# Altium PCB STPedal.PcbDoc
Units mm, origin at the board's own origin, x right, y up, seen from the top; angles counter-clockwise.
Board outline 119 x 94 mm, 2 copper layers (Top Layer, Bottom Layer); 123 components, 78 nets, 413 pads, 17 vias.
Unrouted connection lines stored in the file: 277.
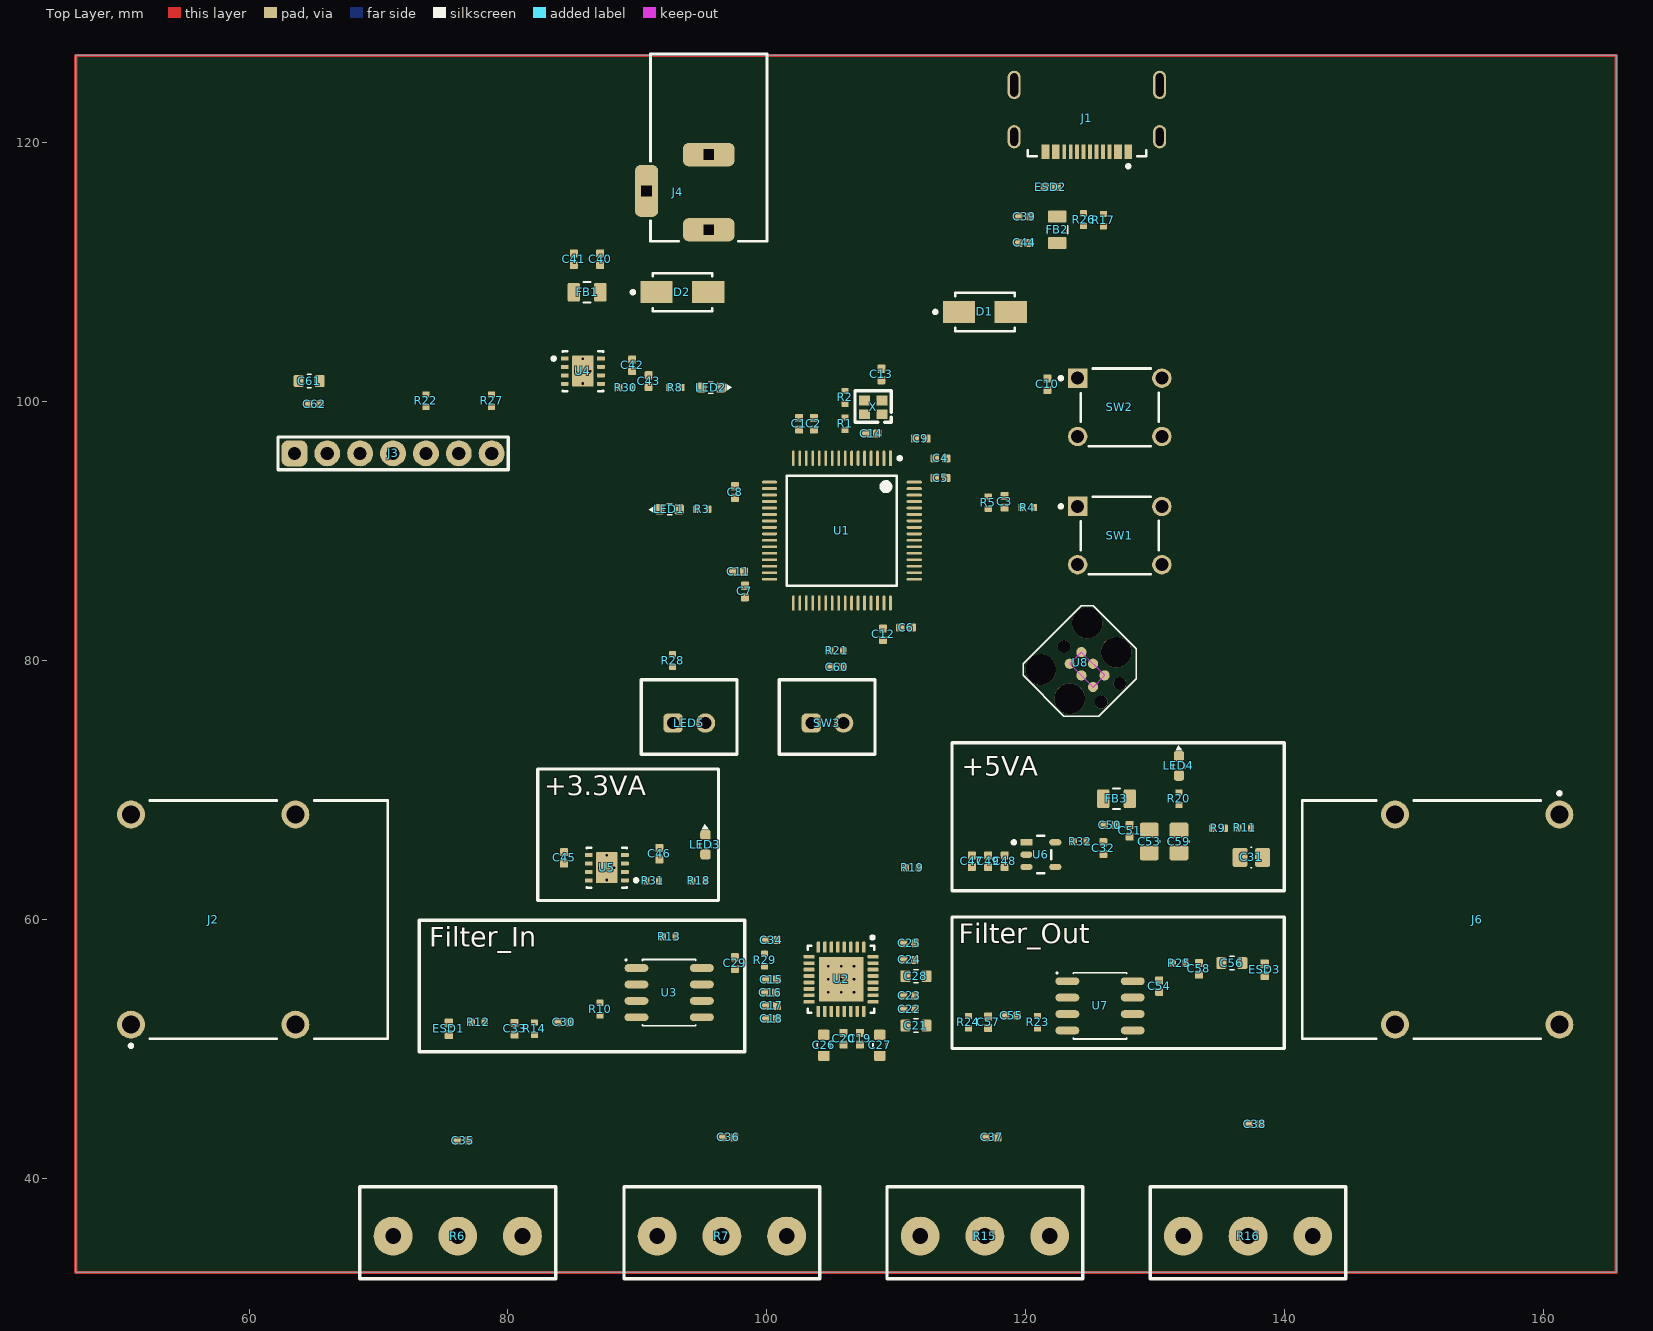
[diagram p0: Top Layer view]
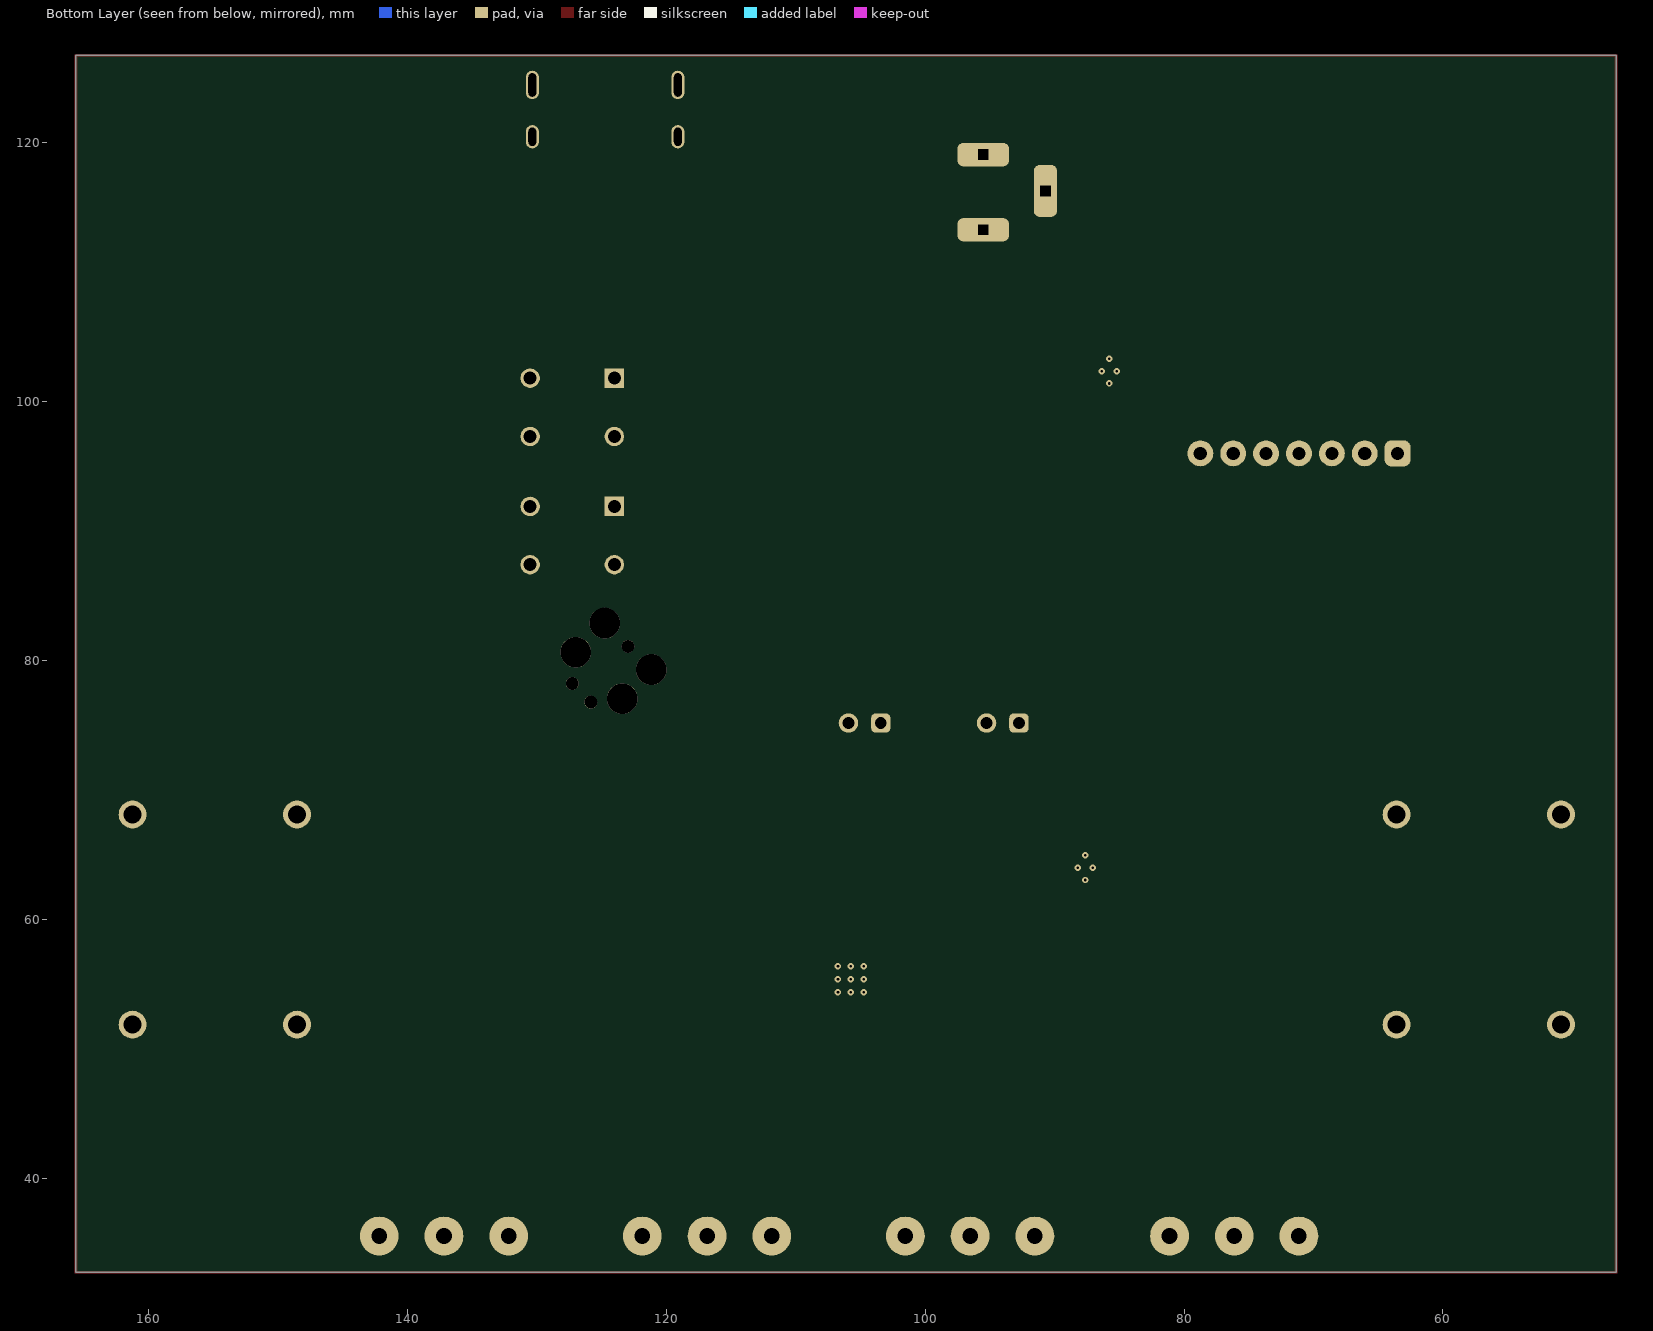
[diagram p1: Bottom Layer view, seen from below]

## Layer stack, top to bottom
Top Solder: solder mask 0.0102, Solder Resist, Dk 3.5
Top Layer: signal copper 0.0356
Dielectric 1: dielectric 0.32, FR-4, Dk 4.8
Bottom Layer: signal copper 0.0356
Bottom Solder: solder mask 0.0102, Solder Resist, Dk 3.5

## Board outline
46.608,32.746 46.608,126.746 165.608,126.746 165.608,32.746

## Design rules (kind name [scope] priority, off if disabled: settings)
Clearance [All] p1: gap=0.254 ignorepadtopadclearanceinfootprint=FALSE
DiffPairsRouting [All] p1: maxlimit=0.254 minlimit=0.254 mostfreqgap=0.254 toplayer_minwidth=0.381 toplayer_maxwidth=0.381 toplayer_prefwidth=0.381 bottomlayer_minwidth=0.381 bottomlayer_maxwidth=0.381 bottomlayer_prefwidth=0.381 maxuncoupledlength=12.7
PolygonConnect [All] p1: connectstyle=Relief reliefconductorwidth=0.254 reliefentries=4 polygonreliefangle="90 Angle" airgapwidth=0.254
RoutingVias [All] p1: holewidth=0.711 width=1.27 viastyle="Through Hole" minholewidth=0.711 minwidth=1.27 maxholewidth=0.711 maxwidth=1.27
SolderMaskExpansion [All] p1: expansion=0 istentingtop=FALSE
SupplyNets "Schematic Supply Nets_8" [InNet('VBUS')] p1: voltage=0.000
SupplyNets "Schematic Supply Nets_7" [InNet('+5V')] p2: voltage=0.000
SupplyNets "Schematic Supply Nets_6" [InNet('+5VA')] p3: voltage=0.000
SupplyNets "Schematic Supply Nets_5" [InNet('+3.3VA')] p4: voltage=0.000
SupplyNets "Schematic Supply Nets_4" [InNet('VREF')] p5: voltage=0.000
SupplyNets "Schematic Supply Nets_3" [InNet('VCC')] p6: voltage=0.000
SupplyNets "Schematic Supply Nets_2" [InNet('+3.3V')] p7: voltage=0.000
SupplyNets "Schematic Supply Nets_1" [InNet('GND')] p8: voltage=0.000
SupplyNets "Schematic Supply Nets" [InNet('VBUS_FIL')] p9: voltage=0.000
Width [All] p1: maxlimit=0.254 minlimit=0.254 preferedwidth=0.254
29 further rules are at their usual default settings.

## Classes and differential pairs
component class STPedal_STM32: C1 C2 C3 C4 C5 C6 C7 C8 C9 C10 C11 C12 C13 C14 LED1 R1 R2 R3 R4 R5 R28 SW1 SW2 U1 U8 X
component class STPedal_Power: C32 C40 C41 C42 C43 C45 C46 C47 C48 C49 C50 C51 C53 C59 D1 D2 FB1 FB3 J4 LED2 LED3 LED4 R8 R18 R19 R20 R30 R31 R32 U4 U5 U6
component class STPedal_Peripherals: C35 C36 C37 C38 C39 C44 C61 C62 ESD2 FB2 J1 J3 R6 R7 R15 R16 R17 R22 R26 R27
component class STPedal_Audio: C15 C16 C17 C18 C19 C20 C21 C22 C23 C24 C25 C26 C27 C28 C29 C30 C31 C33 C34 C54 C55 C56 C57 C58 ESD1 ESD3 J2 J6 R9 R10 R11 R12 R13 R14 R23 R24 R25 R29 U2 U3 U7
differential pair USB_DATA: +USB_DATA_P -USB_DATA_N

## Components (designator, comment, footprint, x,y, rotation, side; value= is the part's Value field where it differs from the comment)
C1 "1uF" CAPC_0402_1005X55N 102.489,98.298 r270 top
C2 "10nF" CAPC_0402_1005X55N 103.632,98.298 r270 top
C3 "0.1uF" CAPC_0402_1005X55N 118.364,92.266 r270 top
C4 "4.7uF" CAPC_0402_1005X55N 113.411,95.631 r180 top
C5 "0.1uF" CAPC_0402_1005X55N 113.411,94.107 r180 top
C6 "0.1uF" CAPC_0402_1005X55N 110.744,82.55 r180 top
C7 "0.1uF" CAPC_0402_1005X55N 98.298,85.344 r90 top
C8 "0.1uF" CAPC_0402_1005X55N 97.536,93.027 r270 top
C9 "0.1uF" CAPC_0402_1005X55N 111.887,97.155 r180 top
C10 "0.1uF" CAPC_0402_1005X55N 121.666,101.346 r90 top
C11 "2.2uF" CAPC_0402_1005X55N 97.79,86.868 r0 top
C12 "2.2uF" CAPC_0402_1005X55N 108.966,82.042 r90 top
C13 "6pF" CAPC_0402_1005X55N 108.839,102.108 r270 top
C14 "6pF" CAPC_0402_1005X55N 108.077,97.536 r180 top
C15 "1uF" CAPC_0402_1005X55N 100.33,55.372 r0 top
C16 "1uF" CAPC_0402_1005X55N 100.267,54.356 r0 top
C17 "1uF" CAPC_0402_1005X55N 100.33,53.34 r0 top
C18 "1uF" CAPC_0402_1005X55N 100.33,52.324 r0 top
C19 "1uF" CAPC_0402_1005X55N 107.188,50.8 r90 top
C20 "1uF" CAPC_0402_1005X55N 105.918,50.8 r90 top
C21 "10uF" RESC_0603_1608X55N 111.506,51.816 r180 top
C22 "1uF" CAPC_0402_1005X55N 110.998,53.086 r180 top
C23 "0.1uF" CAPC_0402_1005X55N 110.998,54.102 r180 top
C24 "4.7uF" CAPC_0402_1005X55N 110.998,56.896 r180 top
C25 "0.1uF" CAPC_0402_1005X55N 110.998,58.166 r180 top
C26 "10uF" RESC_0603_1608X55N 104.394,50.292 r90 top
C27 "10uF" RESC_0603_1608X55N 108.712,50.292 r90 top
C28 "10uF" RESC_0603_1608X55N 111.506,55.626 r180 top
C29 "0.1uF" CAPC_0402_1005X55N 97.528,56.642 r90 top
C30 "2.2uF" CAPC_0402_1005X55N 84.32,52.07 r180 top
C31 "47uF" CAPC_0805_2012X145N 137.414,64.799 r180 top
C32 "2.2uF" CAPC_0402_1005X55N 125.984,65.524 r90 top
C33 "10nF" CAPC_0402_1005X55N 80.51,51.562 r90 top
C34 "10nF" CAPC_0402_1005X55N 100.33,58.42 r180 top
C35 "0.1uF" CAPC_0402_1005X55N 76.517,42.926 r180 top
C36 "0.1uF" CAPC_0402_1005X55N 97.028,43.18 r180 top
C37 "0.1uF" CAPC_0402_1005X55N 117.348,43.18 r180 top
C38 "0.1uF" CAPC_0402_1005X55N 137.668,44.196 r180 top
C39 "2.2uF" CAPC_0402_1005X55N 119.888,114.3 r0 top
C40 "2.2uF" CAPC_0402_1005X55N 87.122,110.998 r270 top
C41 "2.2uF" CAPC_0402_1005X55N 85.09,110.998 r270 top
C42 "2.2uF" CAPC_0402_1005X55N 89.595,102.807 r90 top
C43 "2.2uF" CAPC_0402_1005X55N 90.865,101.6 r270 top
C44 "2.2uF" CAPC_0402_1005X55N 119.888,112.268 r0 top
C45 "2.2uF" CAPC_0402_1005X55N 84.328,64.77 r270 top
C46 "2.2uF" CAPC_0402_1005X55N 91.694,65.087 r270 top
C47 "2.2uF" CAPC_0402_1005X55N 115.824,64.508 r270 top
C48 "2.2uF" CAPC_0402_1005X55N 118.364,64.508 r270 top
C49 "2.2uF" CAPC_0402_1005X55N 117.094,64.508 r270 top
C50 "2.2uF" CAPC_0402_1005X55N 126.492,67.302 r180 top
C51 "2.2uF" CAPC_0402_1005X55N 128.016,66.857 r90 top
C53 "47uF" CAPC_0805_2012X145N 129.54,66.032 r90 top
C54 "0.1uF" CAPC_0402_1005X55N 130.302,54.864 r270 top
C55 "2.2uF" CAPC_0402_1005X55N 118.872,52.578 r0 top
C56 "10uF" RESC_0603_1608X55N 135.911,56.642 r180 top
C57 "10nF" CAPC_0402_1005X55N 117.094,52.07 r90 top
C58 "10nF" CAPC_0402_1005X55N 133.371,56.197 r90 top
C59 "47uF" CAPC_0805_2012X145N 131.826,66.032 r90 top
C60 "0.1uF" CAPC_0402_1005X55N 105.41,79.502 r0 top
C61 "10uF" RESC_0603_1608X55N 64.643,101.6 r0 top
C62 "0.1uF" CAPC_0402_1005X55N 65.024,99.822 r0 top
D1 "B120AF-13" FP-SMAF-MFG 116.84,106.934 r0 top
D2 "B120AF-13" FP-SMAF-MFG 93.472,108.458 r0 top
ESD1 "CG0402MLU-12G" DIOC_0402_1005X41N 75.43,51.562 r90 top
ESD2 "CG0402MLU-12G" DIOC_0402_1005X41N 121.92,116.586 r0 top
ESD3 "CG0402MLU-12G" DIOC_0402_1005X41N 138.451,56.134 r90 top
FB1 "100R" FBC_0805_2012X105N 86.106,108.458 r180 top
FB2 "100R" FBC_0805_2012X105N 122.428,113.284 r270 top
FB3 "600R" FBC_0805_2012X105N 127,69.334 r0 top
J1 "216990-0001" FP-216990-0001-MFG 124.714,123.317 r180 top
J2 "NMJ4HFD2" FP-NMJ4HFD2-MFG 54.102,60 r180 top
J3 "7P_HeaderF" 7P_2.54 71.12,96.012 r0 top
J4 "694106301002" 694106301002 95.504,119.634 r180 top
J6 "NMJ4HFD2" FP-NMJ4HFD2-MFG 157.988,60 r0 top
LED1 "LED_White_JLCD_0603" LED_0603_1608 92.456,91.694 r180 top
LED2 "LED_Red_JLCD_0603" LED_0603_1608 95.691,101.092 r0 top
LED3 "LED_Red_JLCD_0603" LED_0603_1608 95.25,65.786 r90 top
LED4 "LED_Red_JLCD_0603" LED_0603_1608 131.826,71.874 r90 top
LED5 "LED_EXT_2.54mm" "Plugin 2P, 2.5mm" 94,75.184 r0 top
R1 "100" RESC_0402_1005X40N 106.045,98.298 r90 top
R2 "1k" RESC_0402_1005X40N 106.045,100.33 r270 top
R3 "1k" RESC_0402_1005X40N 94.996,91.694 r0 top
R4 "100" RESC_0402_1005X40N 120.142,91.821 r0 top
R5 "1k" RESC_0402_1005X40N 117.094,92.202 r270 top
R6 "250k" POT_Plugin-3P_5mm 76.12,35.56 r0 top
R7 "250k" POT_Plugin-3P_5mm 96.52,35.56 r0 top
R8 "1k" RESC_0402_1005X40N 92.918,101.092 r180 top
R9 "1k" RESC_0402_1005X40N 134.874,67.056 r180 top
R10 "1M" RESC_0402_1005X40N 87.114,53.086 r270 top
R11 "1k" RESC_0402_1005X40N 136.906,67.085 r180 top
R12 "100" RESC_0402_1005X40N 77.716,52.07 r0 top
R13 "100" RESC_0402_1005X40N 92.448,58.674 r0 top
R14 "1M" RESC_0402_1005X40N 82.034,51.562 r90 top
R15 "250k" POT_Plugin-3P_5mm 116.84,35.56 r0 top
R16 "250k" POT_Plugin-3P_5mm 137.16,35.56 r0 top
R17 "5.1k" RESC_0402_1005X40N 125.984,114.025 r270 top
R18 "1k" RESC_0402_1005X40N 94.721,62.992 r180 top
R19 "1k" RESC_0402_1005X40N 111.231,64.008 r180 top
R20 "1k" RESC_0402_1005X40N 131.826,69.334 r90 top
R21 "10k" RESC_0402_1005X40N 105.41,80.772 r180 top
R22 "10k" RESC_0402_1005X40N 73.66,100.076 r90 top
R23 "1M" RESC_0402_1005X40N 120.904,52.07 r270 top
R24 "100" RESC_0402_1005X40N 115.57,52.07 r90 top
R25 "100" RESC_0402_1005X40N 131.847,56.642 r180 top
R26 "5.1k" RESC_0402_1005X40N 124.46,114.067 r270 top
R27 "10k" RESC_0402_1005X40N 78.74,100.076 r90 top
R28 "1k" RESC_0402_1005X40N 92.71,80.01 r90 top
R29 "0" RESC_0402_1005X40N 99.822,56.875 r270 top
R30 "0" RESC_0402_1005X40N 89.087,101.092 r0 top
R31 "0" RESC_0402_1005X40N 91.186,62.992 r0 top
R32 "0" RESC_0402_1005X40N 124.206,66.032 r0 top
SW1 "B3F-1000" OMRON-B3F-1000-4_V 127.254,89.662 r0 top
SW2 "B3F-1000" OMRON-B3F-1000-4_V 127.254,99.568 r0 top
SW3 "Switch_Ext_B2B-XH-A" "Plugin 2P, 2.5mm" 104.668,75.184 r0 top
U1 "STM32F405RGT6TR" FP-LQFP64-5W-IPC_C 105.791,90.043 r270 top
U2 "TLV320AIC3204IRHBR" RHB0032E_V 105.729,55.392 r270 top
U3 "TL072" SO-8 92.448,54.356 r0 top
U4 "LP5907QMFX-3.3Q1" FP-DRB0008J-MFG 85.785,102.362 r0 top
U5 "LP5907QMFX-3.3Q1" FP-DRB0008J-MFG 87.63,64.008 r180 top
U6 "NCP718BSNADJT1G" FP-419AE-01-IPC_C 121.158,65.016 r0 top
U7 "TL072" SO-8 125.73,53.34 r0 top
U8 "TC2030_CTX" TC2030_CTX 124.74,79.31 r315 top
X "CS08891-24M" "4 SMD - No Lead" 108.204,99.568 r180 top

## Footprints (in the part's own frame and the unit in brackets; to place one, negate y for a bottom-side part, rotate by r counter-clockwise, add the part's x,y. Pads: shape width x height; smd on the part's side, far side on the other; paste and mask are expansions set on the pad)
"4 SMD - No Lead" [mm]
  rect 0.85x0.75 smd: 1(-0.675,-0.525) 2(0.675,-0.525) 3(0.675,0.525) 4(-0.675,0.525)
  silkscreen extent -1.4,-1.27 1.4,1.14, body extent -1.05,-0.85 1.05,0.85, height 0.51
7P_2.54 [mm] "7 Pin, 2.54mm pitch"
  rrect50% 2x2 hole 1.02: 1(-7.62,0)
  round 2 hole 1.02: 2(-5.08,0) 3(-2.54,0) 4(0,0) 5(2.54,0) 6(5.08,0) 7(7.62,0)
  silkscreen extent -8.89,-1.27 8.89,1.27, body extent -9.14,-1.27 9.14,1.27, height 8.51
694106301002 [mm] "DC Power Jack Right Angled(6.4)"
  rrect50% 4x1.8 hole 0.8 square: 1(0,6.35) 2(0,0.55)
  rrect50% 1.8x4 hole 0.8 square: 3(4.8,3.35)
  silkscreen extent -4.5,-7.25 4.5,7.25, body extent -4.5,-7.25 5,7.25, height 10.75
CAPC_0402_1005X55N [mm] "Chip Capacitor, 2-Leads, Body 1.00x0.50mm, IPC Medium Density"
  rrect25% 0.63x0.62 smd: 1(-0.445,0) 2(0.445,0)
  body extent -0.5,-0.25 0.5,0.25, height 0.55
CAPC_0805_2012X145N [mm] "Chip Capacitor, 2-Leads, Body 2.00x1.25mm, IPC Medium Density"
  rrect25% 1.15x1.45 smd: 1(-0.875,0) 2(0.875,0)
  silkscreen extent -0.04,-0.79 0.04,0.79, body extent -1,-0.63 1,0.63, height 1.45
DIOC_0402_1005X41N [mm] "Chip Diode, 2-Leads, Body 1.00x0.50mm, IPC Medium Density"
  rrect25% 0.7x0.65 smd: 1(-0.45,0) 2(0.45,0)
  body extent -0.5,-0.25 0.5,0.25, height 0.41
FBC_0805_2012X105N [mm] "Ferrite Bead, 2-Leads, Body 2.00x1.25mm, IPC Medium Density"
  rrect25% 0.95x1.45 smd: 1(-1.025,0) 2(1.025,0)
  silkscreen extent -0.29,-0.79 0.29,0.79, body extent -1,-0.63 1,0.63, height 1.05
FP-419AE-01-IPC_C [mm]
  rect 0.94x0.486 smd paste+0 mask+0: 1(-1.115,0.95)
  rrect100% 0.94x0.486 smd paste+0 mask+0: 2(-1.115,0) 3(-1.115,-0.95) 4(1.116,-0.95) 5(1.116,0.95)
  silkscreen extent -2.21,-1.45 0.8,1.45, body extent -1.69,-1.55 1.69,1.55, height 0.25
FP-216990-0001-MFG [mm]
  rrect100% 1x1.8 hole 1.4 slot 0.6 at 0 deg paste-2539.97 mask+0: 1(-5.62,2.85) 2(5.62,2.85)
  rrect100% 1x2.2 hole 1.8 slot 0.6 at 0 deg paste-2539.97 mask+0: 3(-5.62,-1.15) 4(5.62,-1.15)
  rect 0.6x1.1 smd paste+0 mask+0: A1-B12(-3.2,4) A4-B9(-2.4,4) A9-B4(2.4,4) A12-B1(3.2,4)
  rect 0.3x1.1 smd paste+0 mask+0: A5(-1.25,4) A6(-0.25,4) A7(0.25,4) A8(1.25,4) B5(1.75,4) B6(0.75,4) B7(-0.75,4) B8(-1.75,4)
  silkscreen extent -4.57,3.9 4.57,5.25, body extent -6.22,-3.45 6.22,4.65, height 0.25
FP-DRB0008J-MFG [mm]
  rrect32% 0.6x0.31 smd paste+0 mask+0: 1(-1.4,0.975) 2(-1.4,0.325) 3(-1.4,-0.325) 4(-1.4,-0.975) 5(1.4,-0.975) 6(1.4,-0.325) 7(1.4,0.325) 8(1.4,0.975)
  rrect6% 1.65x2.4 smd paste-1000 mask+0: 9(0,0)
  silkscreen extent -2.38,-1.55 1.55,1.55, body extent -1.8,-1.65 1.8,1.65, height 0.25
FP-LQFP64-5W-IPC_C [mm]
  rect 1.188x0.212 smd paste+0 mask+0: 1(-5.591,3.75)
  rrect100% 1.188x0.212 smd paste+0 mask+0: 2(-5.591,3.25) 3(-5.591,2.75) 4(-5.591,2.25) 5(-5.591,1.75) 6(-5.591,1.25) 7(-5.591,0.75) 8(-5.591,0.25) 9(-5.591,-0.25) 10(-5.591,-0.75) 11(-5.591,-1.25) 12(-5.591,-1.75) 13(-5.591,-2.25) 14(-5.591,-2.75) 15(-5.591,-3.25) 16(-5.591,-3.75) 33(5.591,-3.75) 34(5.591,-3.25) 35(5.591,-2.75) 36(5.591,-2.25) 37(5.591,-1.75) 38(5.591,-1.25) 39(5.591,-0.75) 40(5.591,-0.25) 41(5.591,0.25) 42(5.591,0.75) 43(5.591,1.25) 44(5.591,1.75) 45(5.591,2.25) 46(5.591,2.75) 47(5.591,3.25) 48(5.591,3.75)
  rrect100% 0.212x1.188 smd paste+0 mask+0: 17(-3.75,-5.591) 18(-3.25,-5.591) 19(-2.75,-5.591) 20(-2.25,-5.591) 21(-1.75,-5.591) 22(-1.25,-5.591) 23(-0.75,-5.591) 24(-0.25,-5.591) 25(0.25,-5.591) 26(0.75,-5.591) 27(1.25,-5.591) 28(1.75,-5.591) 29(2.25,-5.591) 30(2.75,-5.591) 31(3.25,-5.591) 32(3.75,-5.591) 49(3.75,5.591) 50(3.25,5.591) 51(2.75,5.591) 52(2.25,5.591) 53(1.75,5.591) 54(1.25,5.591) 55(0.75,5.591) 56(0.25,5.591) 57(-0.25,5.591) 58(-0.75,5.591) 59(-1.25,5.591) 60(-1.75,5.591) 61(-2.25,5.591) 62(-2.75,5.591) 63(-3.25,5.591) 64(-3.75,5.591)
  silkscreen extent -5.72,-4.25 4.25,4.59, body extent -6.29,-6.29 6.29,6.29, height 0.25
FP-NMJ4HFD2-MFG [mm]
  round 2.15 hole 1.4 paste-2539.97 mask+0: S(3.225,8.115) SN(3.225,-8.115) T(-9.475,8.115) TN(-9.475,-8.115)
  silkscreen extent -16.63,-9.2 3.35,9.87, body extent -16.73,-9.3 16.73,9.3, height 0.25
FP-SMAF-MFG [mm]
  rect 2.5x1.7 smd paste+0 mask+0: 1(-2,0) 2(2,0)
  silkscreen extent -3.95,-1.48 2.3,1.48, body extent -3.35,-1.58 3.35,1.58, height 0.25
LED_0603_1608 [mm]
  rrect50% 0.8x0.8 smd: 1(-0.75,0) 2(0.75,0)
  silkscreen extent -0.23,-0.43 1.59,0.43, body extent -0.8,-0.41 0.8,0.39, height 0.55
OMRON-B3F-1000-4_V [mm] "TH, 4-Leads, Body 6x6mm"
  rect 1.5x1.5 hole 1 paste-2539.97: 1(-3.25,2.25)
  round 1.5 hole 1 paste-2539.97: 2(3.25,2.25) 4(3.25,-2.25)
  round 1.5 hole 1 paste-2539.97 mask+0.102: 3(-3.25,-2.25)
  silkscreen extent -4.67,-3 3,3, body extent -3.4,-3 3.4,3, height 4.5
"Plugin 2P, 2.5mm" [mm] "2.5mm pitch THT footprint"
  rrect50% 1.5x1.5 hole 0.9: 1(-1.25,0)
  round 1.5 hole 0.9: 2(1.25,0)
  silkscreen extent -3.72,-2.41 3.68,3.34, body extent -3.7,-2.37 3.7,3.38, height 7
POT_Plugin-3P_5mm [mm] "Generic Footprint for Pots"
  round 3 hole 1.2: 1(-5,0) 2(0,0) 3(5,0)
  silkscreen extent -7.56,-3.3 7.56,3.8, body extent -8.25,-18.7 8.25,5.6, height 22.25
RESC_0402_1005X40N [mm] "Chip Resistor, 2-Leads, Body 1.00x0.50mm, IPC Medium Density"
  rrect25% 0.475x0.55 smd: 1(-0.487,0) 2(0.487,0)
  body extent -0.5,-0.25 0.5,0.25, height 0.4
RESC_0603_1608X55N [mm] "Chip Resistor, 2-Leads, Body 1.60x0.80mm, IPC Medium Density"
  rrect25% 0.775x0.9 smd: 1(-0.813,0) 2(0.813,0)
  silkscreen extent -0.16,-0.51 0.16,0.51, body extent -0.8,-0.4 0.8,0.4, height 0.55
RHB0032E_V [mm] "QFN, 32-Leads, Body 5x5mm, Pitch 0.5mm, Thermal Pad 3.45x3.45mm"
  rrect36% 0.85x0.28 smd: 1(-2.475,1.75) 2(-2.475,1.25) 3(-2.475,0.75) 4(-2.475,0.25) 5(-2.475,-0.25) 6(-2.475,-0.75) 7(-2.475,-1.25) 8(-2.475,-1.75) 17(2.475,-1.75) 18(2.475,-1.25) 19(2.475,-0.75) 20(2.475,-0.25) 21(2.475,0.25) 22(2.475,0.75) 23(2.475,1.25) 24(2.475,1.75)
  rrect36% 0.28x0.85 smd: 9(-1.75,-2.475) 10(-1.25,-2.475) 11(-0.75,-2.475) 12(-0.25,-2.475) 13(0.25,-2.475) 14(0.75,-2.475) 15(1.25,-2.475) 16(1.75,-2.475) 25(1.75,2.475) 26(1.25,2.475) 27(0.75,2.475) 28(0.25,2.475) 29(-0.25,2.475) 30(-0.75,2.475) 31(-1.25,2.475) 32(-1.75,2.475)
  rrect3% 3.45x3.45 smd: 33(0,0)
  silkscreen extent -3.35,-2.58 2.58,2.57, body extent -2.5,-2.5 2.5,2.5, height 1
SO-8 [mm] "SOIC, 8-Leads, Body 4.90x3.90mm, Pitch 1.27mm, IPC Medium Density"
  oval 1.85x0.6 smd: 1(-2.525,1.905) 2(-2.525,0.635) 3(-2.525,-0.635) 4(-2.525,-1.905) 5(2.525,-1.905) 6(2.525,-0.635) 7(2.525,0.635) 8(2.525,1.905)
  silkscreen extent -3.39,-2.56 2.06,2.59, body extent -1.95,-2.45 1.95,2.45, height 1.75
TC2030_CTX [mm]
  round 0.787 smd: 1(-1.27,-0.635) 2(-1.27,0.635) 3(0,-0.635) 4(0,0.635) 5(1.27,-0.635) 6(1.27,0.635)
  round 0.991 hole 0.991 unplated: ""(-2.54,0) ""(2.54,-1.016) ""(2.54,1.016)
  round 2.375 hole 2.375 unplated: ""(-2.54,2.54) ""(-2.54,-2.54) ""(0.635,2.54) ""(0.635,-2.54)
  Top Layer keep-out region: -1.27,-0.635 1.27,-0.635 1.27,0.635 -1.27,0.635
  silkscreen extent -3.81,-3.81 3.18,3.81

## Part data
C1 C15 C16 C17 C18 C19 C20 C22: library part 1uF_CAP_0402, "Capacitor 0402 - 1uF +-/10% / 25V", LCSC=C52923, Manufacturer="Samsung Electro-Mechanics", MPN=CL05A105KA5NQNC
C2 C33 C34 C57 C58: library part 10nF_CAP_0402, "Capacitor 0402 - 10nF +-/10% / 25V", LCSC=C15195, Manufacturer="Samsung Electro-Mechanics", MPN=CL05B103KB5NNNC
C3 C5 C6 C7 C8 C9 C10 C23 C25 C29 C35 C36 C37 C38 C54 C60 C62: library part 0.1uF_CAP_0402, "Capacitor 0402 - 0.1uF +-/10% / 16V", LCSC=C1525, Manufacturer="Samsung Electro-Mechanics", MPN=CL05B104KO5NNNC
C4 C24: library part 4.7uF_CAP_0402, "Capacitor 0402 - 4.7uF +-/20% / 10V", LCSC=C23733, Manufacturer="Samsung Electro-Mechanics", MPN=CL05A475MP5NRNC
C11 C12 C30 C32 C39 C40 C41 C42 C43 C44 C45 C46 C49 C50 C51 C55: library part 2.2uF_CAP_0402, "Capacitor 0402 - 2.2uF +-/10% / 25V", LCSC=C12530, Manufacturer="Samsung Electro-Mechanics", MPN=CL05A225MQ5NSNC
C13 C14: library part 6pF_CAP_0402, "Capacitor 0402 - 6pF +-/10% / 50V - C0G", LCSC=C1575, Manufacturer="FH (Guangdong Fenghua Advanced Tech)", MPN=0402CG6R0C500NT
C21 C26 C27 C28 C56 C61: library part 10uF_CAP_0603, "Capacitor 0603 - 0.1uF +-/10% / 25V", LCSC=C96446, Manufacturer="Samsung Electro-Mechanics", MPN=CL10A106MA8NRNC
C31 C47 C48 C53 C59: library part 47uF_CAP_0805, "47uF 6.3V X5R ±20% 0805 Multilayer Ceramic Capacitors MLCC - SMD/SMT ROHS", LCSC=C16780, Manufacturer="Samsung Electro-Mechanics", MPN=CL21A476MQYNNNE
D1 D2: library part CMP-12790-000092-1, "DIODE SCHOTTKY 20V 1A SMAF", Average Rectified Current=1A, LCSC=C5125499, Max Reverse Voltage (DC)=20V, Mount="Surface Mount", Packaging="Tape and Reel", RoHS Compliant=Yes
ESD1 ESD2 ESD3: "-40℃~+125℃ 0.05pF 1 12V 25V 5nA ESD IEC 61000-4-2 0402 ESD and Surge Protection (TVS/ESD) ROHS", LCSC=C2655716, Manufacturer=BOURNS, MPN=CG0402MLU-12G
FB1 FB3: library part 600@100MHz_JLCFB_0805, "-55℃~+125℃ 1 300mΩ 500mA 600Ω@100MHz ±25% 0805 Ferrite Beads ROHS", LCSC=C1017, Manufacturer=Sunlord, MPN=GZ2012D601TF
FB2: library part 100@100MHz_JLCFB_0805, "-55℃~+155℃ 5.1kΩ 50V 62.5mW Thick Film Resistor ±1% ±100ppm/℃ 0402 Chip Resistor - Surface Mount ROHS", LCSC=C1015, Manufacturer=Sunlord, MPN=GZ2012D101TF
J1: library part CMP-04767-000014-1, "CONN RCP USB2.0 TYP C 24P SMD RA", LCSC=C3197869
J2 J6: library part CMP-78736-000001-1, "Conn 1/4\" Mono Jack F 3 POS Solder RA Thru-Hole 3 Terminal 1 Port", Current Rating=0.5A, Manufacturer=Neutrik, Package=0, Temperature="-25°C to +70°C", Temperature Range High=+70°C, Temperature Range Low=-25°C, Voltage Rating=50V, Automotive=No, Category=Conn, ComponentLink2Description=Datasheet, ComponentLink2URL=https://www.neutrik.com/en/product/nmj4hfd2.pdf, Conn Orientation=Horizontal, Contact Material=Silver, Device Class L1=Connectors, Device Class L2="Audio / Video Connectors", Device Class L3=unset, Footprint Url=https://www.neutrik.com/media/8576/download/st-nmj4hfd2.pdf?v=1, Height=15.89mm, Is Female=yes, Lead Free=Yes, Manufacturer Part Number=NMJ4HFD2, Mouser Description="Phone Audio Connector, Socket, 2, PCB Mount, Metal Body, Silver Plated Contacts", Number Of Contacts=2, Octopart=https://octopart.com/nmj4hfd2-neutrik-758952, RoHS=TRUE
J3: library part 7P_FemaleHeader_2.54mm
J4: library part CMP-1502-00188-3, "DC Power Jack Connector WR-DC, Male, Right Angled, THT, 5 A, 24 V", Color=Black, Current Rating=5A, Flammability Rating="UL94 V-0", Insulation Resistance=100MΩ, LCSC=C5441017, Max Operating Temperature=85°C, Min Operating Temperature=-40°C, Operating Supply Voltage=24V, Connector Type=Power, Contact Gender=Female, Contact Material="Gold, Tin", Contact Plating=Tin, Gender=Male, Height=11mm, Housing Material=Polyamide, Mount="Through Hole", Number Of Contacts=3, Packaging=Bulk, REACH SVHC=Unknown, RoHS=Compliant, Shielding=Unshielded, Termination="Through Hole", Voltage Rating=24V
LED1: "-40℃~+85℃ 100mW 120° 2.6V~3.1V 360mcd 5mA Discrete Diode Top-mount White Yellow Lens 0603 LED Indication - Discrete ROHS", LCSC=C2290, Manufacturer="Hubei KENTO Elec", MPN=KT-0603W
LED2 LED3 LED4: "-40℃~+85℃ 1.8V~2.4V 120° 20mA 300mcd 40mW 615nm~630nm 645nm Discrete Diode Red Water Clear 0603 LED Indication - Discrete ROHS", LCSC=C2286, Manufacturer="Hubei KENTO Elec", MPN=KT-0603R
LED5: "External LED. Uses JST footprint 2.54mm pitch", LCSC=C2290, Manufacturer="Hubei KENTO Elec", MPN=KT-0603W
R1 R4 R12 R13 R19 R24 R25: library part 100R_JLCRES-0402, "Resistor 0402 - 100R", LCSC=C25076
R2 R3 R5 R8 R9 R11 R18 R20 R28: library part 1k_JLCRES-0402, "Resistor 0402 - 1k", LCSC=C11702, Manufacturer="UNI-ROYAL(Uniroyal Elec)", MPN=0402WGF1001TCE
R6 R7 R15 R16: library part POT_Gen_5mm, "Generic Potentiometer 5mm pitch"
R10 R14 R23: library part 1M_JLCRES-0402, "-55℃~+155℃ 1MΩ 50V 62.5mW Thick Film Resistor ±1% ±100ppm/℃ 0402 Chip Resistor - Surface Mount ROHS", LCSC=C26083, Manufacturer="UNI-ROYAL(Uniroyal Elec)", MPN=0402WGF1004TCE
R17 R26: library part 5.1k_JLCRES-0402, "-55℃~+155℃ 5.1kΩ 50V 62.5mW Thick Film Resistor ±1% ±100ppm/℃ 0402 Chip Resistor - Surface Mount ROHS", LCSC=C25905, Manufacturer="UNI-ROYAL(Uniroyal Elec)", MPN=0402WGF5101TCE
R21 R22 R27: library part 10k_JLCRES-0402, "-55℃~+155℃ 10kΩ 50V 62.5mW Thick Film Resistor ±1% ±100ppm/℃ 0402 Chip Resistor - Surface Mount ROHS", LCSC=C25744, Manufacturer="UNI-ROYAL(Uniroyal Elec)", MPN=0402WGF1002TCE
R29 R30 R31 R32: library part 0R_JLCRES-0402, "-55℃~+155℃ 0Ω 50V 62.5mW Thick Film Resistor ±1% ±800ppm/℃ 0402 Chip Resistor - Surface Mount ROHS", LCSC=C17168, Manufacturer="UNI-ROYAL(Uniroyal Elec)", MPN=0402WGF0000TCE
SW1 SW2: library part CMP-011-00004-2, "Tactile Switch, SPST-NO, 0.05 A, 24 V, -25 to 70 degC, 4-Pin THD, RoHS, Bulk", Contact Current Rating=50mA, Manufacturer="Omron Electronic Components", Max Contact Resistance=100mohm, Max Operating Temperature=70°C, Max Voltage Rating (DC)=24V, Min Operating Temperature=-25°C, Operating Force=100gf, Package Description="4-Pin Through Hole Device, Body 6 x 6 mm", Package Quantity=1500, Resistance=0.1Ohm, Case/Package=B3F-1000, Contact Material=Gold, Contact Plating=Gold, Current Rating=50mA, Datasheet URL=http://www.omron.com/ecb/products/pdf/en-b3f.pdf, Datasheet Version=Jan-15, Manufacturer URL=http://www.omron.com/, Max Current Rating=50mA, Mounting Technology=TH, Package Reference=B3F-1000, Packaging=Bulk, Pins=4, RoHS Compliant=True, Throw Configuration=SPST, Voltage Rating=24V, Voltage Rating (DC)=24V
SW3: "External Switch footprint for 2 pin 2.5mm pitch connector"
U1: library part CMP-0243-00156-2, "IC MCU 32BIT 1MB FLASH 64LQFP", Case/Package=LQFP, Frequency=168MHz, Max Operating Temperature=85°C, Max Power Dissipation=435mW, Max Supply Voltage=3.6V, Min Operating Temperature=-40°C, Min Supply Voltage=1.8V, Package Quantity=1000, Contact Plating=Tin, Core Architecture=ARM, Data Bus Width=32b, Height=1.45mm, Interface=I2C, Lead Free="Lead Free", Length=10mm, Max Frequency=168MHz, Memory Size=1024KB, Memory Type=FLASH, Mount="Surface Mount", Number of ADC Channels=16, Number of I2C Channels=3, Number of I/Os=51, Number of Pins=64, Number of Programmable I/O=51, Number of SPI Channels=3, Number of Timers/Counters=14, Number of UART Channels=2, Number of USB Channels=2, Oscillator Type=Internal, Packaging="Tape and Reel", Peripherals="Brown-out Detect/Reset", Radiation Hardening=No, RAM Size=196KB, Watchdog Timer=Yes, Width=10mm
U2: library part CMP-0331-00079-2, "Very Low-Power Stereo Audio CODEC with Power Tune? Technology, 2 ADCs and 2 DACs, 100 dB DAC SNR, -40 to 85 degC, 32-pin QFN (RHB), Green (RoHS & no Sb/Br)", Battery Powered=TRUE, Manufacturer="Texas Instruments", # ADCs (typ)=2, # DACs=2, Additional Features="PowerTune (tm), Processing blocks for digital audio effects, LP Bypass, PLL, Digital Mic Support, LDO", Code_JEDEC=MO-220, ComponentLink1Description=Datasheet, ComponentLink1URL=http://www.ti.com/general/docs/lit/getliterature.tsp?genericPartNumber=TLV320AIC3204&fileType=pdf, Control Interface="SPI, I2C", DAC SNR=100, DatasheetVersion=SLOS602A, Digital Audio Interfaces="L, R, I2S, TDM, DSP", Mounting Technology="Surface Mount", PackageDescription="32-Pin Plastic Quad Flat No-Lead, 5 x 5 mm Body, 0.5 mm Pitch, 3.45 x 3.45 mm Exposed Pad", PackageReference=RHB0032E, PackageVersion="revD, Jun-2011", PartNumber=TLV320AIC3204IRHBR, Sampling Rate (Max) (kHz)=192
U3 U7: library part TL072CDT, "0℃~+70℃ 1.4mA 10uV/℃ 15nV/√Hz@1kHz 16V/us 2 20pA 36V 3mV 40mA 4MHz 5pA 6V~36V 86dB SO-8 FET Input Amplifiers ROHS", LCSC=C6961, Manufacturer=STMicroelectronics, MPN=TL072CDT
U4 U5: library part CMP-04917-000370-1, "IC OPAMP", RoHS Compliant=Yes
U6: library part CMP-07128-000004-1, "-40℃~+125℃@(Tj) 1 24V 250mV@(300mA) 300mA 36uVrms 4uA 5V 60dB@(1kHz) Fixed Over Current Protection、Over Temperature Protection、Enable Positive TSOT-23-5 Voltage Regulators - Linear, Low Drop Out (LDO) Regulators ROHS", Dropout Voltage=480mV, LCSC=C892796, Manufacturer="On Semiconductor", Manufacturer Part Number=NCP718BSN500T1G, Max Junction Temp=+125°C, Max Supply Voltage=24V, Min Supply Voltage=2.5V, Nominal Supply Current=50-300uA, Output Current=300mA, Output Voltage=5V, Package=419AE-01, Temperature="to +125°C", Accuracy Percentage=2%, Automotive=No, Category=IC, ComponentLink2Description=Datasheet, ComponentLink2URL=https://www.onsemi.com/pub/Collateral/NCP718-D.PDF, Device Class L1="Integrated Circuits (ICs)", Device Class L2="Power Management ICs", Device Class L3="Voltage Regulators - Linear", Digikey Description="IC REG LINEAR 5V 300MA TSOT-23-5", Height=1mm, Lead Free=Yes, Mouser Description="LDO Regulator, 300 mA, Wide Vin, Ultra-Low Iq Adjustable, Non-Active Discharge, TSOT23-5", Number Of Outputs=1, Octopart=https://octopart.com/ncp718bsnadjt1g-on+semiconductor-87658781, Output Type=Fixed, RoHS=TRUE, Standoff Height=0.01mm, Temperature Range High=+125°C
X: "CRYSTAL 24.0000MHZ 6PF SMD"

## Via types
v1: diameter 0.5, hole 0.2, Top Layer to Bottom Layer, 17 vias

## Nets (pads, with @x,y where several pads share a name; then routed paths per layer and width w, separated by ;. In a path a pad name is that pad's centre, name@x,y a point inside that pad or via, vN(x,y) a via of type N, cw(c..) or ccw(c..) an arc to the next point about the centre after c; other vN are vias at no path point)
+3.3V: C4.2 C5.2 C6.2 C7.2 C8.2 C9.2 C24.2 C25.2 C43.2 C61.2 C62.2 J3.2 R8.2 R21.2 R22.2 R27.2 R30.2 SW1.3 U1.1 U1.19 U1.32 U1.48 U1.64 U2.6 U2.30 U8.1
+3.3VA: C1.2 C2.2 C21.2 C22.2 C23.2 C46.2 R6.1 R7.1 R15.1 R16.1 R18.2 R31.2 U1.13 U2.26
+5V: C32.2 C50.2 FB3.1 R32.2
+5VA: C29.1 C51.2 C53.2 C54.1 C59.2 FB3.2 R9.2 R20.1 U3.8 U7.8
AC_GPIO: U1.2 U2.32
Aud_B_In+: C30.2 R10.1 U3.3
AUDIO_OUT_L: C56.1 ESD3.2 J6.T
CD_NRST: U1.38 U2.31
CODEC_IN1_L: C15.1 R29.2
GND: C1.1 C2.1 C3.1 C4.1 C5.1 C6.1 C7.1 C8.1 C9.1 C10.1 C11.1 C12.1 C13.1 C14.1 C16.1 C17.1 C18.1 C19.1 C20.1 C21.1 C22.1 C23.1 C24.1 C25.1 C26.1 C27.1 C28.1 C29.2 C31.1 C32.1 C33.1 C34.1 C35.1 C36.1 C37.1 C38.1 C39.1 C40.1 C41.1 C42.1 C43.1 C44.1 C45.1 C46.1 C47.1 C48.1 C49.1 C50.1 C51.1 C53.1 C54.2 C57.1 C58.1 C59.1 C60.1 C61.1 C62.1 ESD1.1 ESD2.1 ESD3.1 J1.1 J1.2 J1.3 J1.4 J1.A1-B12 J1.A12-B1 J2.S J3.1 J4.2 J6.S LED1.2 LED2.2 LED3.2 LED4.2 LED5.2 R5.1 R6.3 R7.3 R11.1 R14.1 R15.3 R16.3 R17.2 R26.2 SW2.3 SW3.1 U1.12 U1.18 U1.63 U2.7 U2.8 U2.12 U2.17 U2.28 U3.4 U4.2 U4.4 U4.9 U5.2 U5.4 U5.9 U6.2 U7.4 U8.5 X.2 X.4
  other v1: 87.63,63.058 87.055,64.008 88.205,64.008 87.63,64.958 85.785,101.412 85.21,102.362 86.36,102.362 85.785,103.312
HSE_R1: R1.2 R2.1
I2C2_SCL: U1.29 U2.9
I2C2_SDA: U1.30 U2.10
I2S2_CK: U1.33 U2.2
I2S2_SDI: U1.35 U2.5
I2S2_SDO: U1.36 U2.4
I2S2_WS: U1.34 U2.3
IN1_L: C15.2 U2.13
IN1_R: C16.2 U2.14
IN2_L: C17.2 U2.15
IN2_R: C18.2 U2.16
IN3_L: C19.2 U2.20
IN3_R: C20.2 U2.21
LOL: R24.1 U2.22
LOL_RC: C55.1 C57.2 R24.2
MCLK: U1.37 U2.1
NetC3_2: C3.2 R4.1 R5.2 U1.60
NetC11_2: C11.2 U1.31
NetC12_2: C12.2 U1.47
NetC13_2: C13.2 R2.2 X.1
NetC14_2: C14.2 U1.5 X.3
NetC26_2: C26.2 U2.18
NetC27_2: C27.2 U2.24
NetC28_2: C28.2 U2.29
NetC30_1: C30.1 C33.2 R12.2 R14.2
NetC34_2: C34.2 R13.2 R29.1
NetC41_2: C41.2 C42.2 C45.2 D1.1 FB1.2 R19.2 U4.6 U4.8 U5.6 U5.8
NetC47_2: C47.2 C48.2 C49.2 R19.1 U6.1 U6.3
NetC55_2: C55.2 R23.1 U7.3
NetC56_2: C56.2 C58.2 R25.2
NetD2_2: D2.2 J4.1
NetESD1_2: ESD1.2 J2.T R12.1
NetJ1_A5: J1.A5 R17.1
NetJ1_B5: J1.B5 R26.1
NetLED1_1: LED1.1 R3.1
NetLED2_1: LED2.1 R8.1
NetLED3_1: LED3.1 R18.1
NetLED4_1: LED4.1 R20.2
NetLED5_1: LED5.1 R28.1
NetR1_1: R1.1 U1.6
NetR3_2: R3.2 U1.21
NetR4_2: R4.2 SW1.1
NetR13_1: R13.1 U3.1 U3.2
NetR25_1: R25.1 U7.1 U7.2
NetR28_2: R28.2 U1.9
NetR30_1: R30.1 U4.3 U4.5
NetR31_1: R31.1 U5.1 U5.3
NetR32_1: R32.1 U6.5
nFSW_INT: C60.2 R21.1 SW3.2 U1.10
NRST: C10.2 SW2.1 U1.7 U8.3
OLED_CS: J3.7 R27.1 U1.42
OLED_DC: J3.6 U1.41
OLED_nRST: J3.5 R22.1 U1.23
POT_1: C35.2 R6.2 U1.14
POT_2: C36.2 R7.2 U1.15
POT_3: C37.2 R15.2 U1.16
POT_4: C38.2 R16.2 U1.17
SPI1_MOSI: J3.4 U1.22
SPI1_SCK: J3.3 U1.20
SWCLK: U1.49 U8.4
SWDIO: U1.46 U8.2
SWO: U1.55 U8.6
USB_DATA_N: J1.A7 J1.B7 U1.44
USB_DATA_P: J1.A6 J1.B6 U1.45
VBUS: C39.2 ESD2.2 FB2.1 J1.A4-B9 J1.A9-B4
VBUS_FIL: C44.2 D1.2 FB2.2
VCC: C40.2 D2.1 FB1.1
VREF: C31.2 R9.1 R10.2 R11.2 R23.2
pads on no net: J1.A8 J1.B8 J2.SN J2.TN J4.3 J6.SN J6.TN SW1.2 SW1.4 SW2.2 SW2.4 U1.3 U1.4 U1.8 U1.11 U1.24 U1.25 U1.26 U1.27 U1.28 U1.39 U1.40 U1.43 U1.50 U1.51 U1.52 U1.53 U1.54 U1.56 U1.57 U1.58 U1.59 U1.61 U1.62 U2.11 U2.19 U2.23 U2.25 U2.27 U2.33 U3.5 U3.6 U3.7 U4.1 U4.7 U5.5 U5.7 U6.4 U7.5 U7.6 U7.7 U8.
copper on no net: | length 426
  Top Layer w0.254: 46.608,32.746 165.608,32.746 165.608,126.746 46.608,126.746 46.608,32.746
  other v1: 104.729,54.392 105.729,54.392 106.729,54.392 104.729,55.392 105.729,55.392 106.729,55.392 104.729,56.392 105.729,56.392 106.729,56.392

## Silkscreen, mask and mechanical layers (free items; w line width, h text height)
Top Overlay:
  lines w0.254: 73.144,49.784 98.298,49.784 98.298,59.944 73.144,59.944 73.144,49.784 ; 82.296,61.468 96.266,61.468 96.266,71.628 82.296,71.628 82.296,61.468 ; 114.3,50.038 139.954,50.038 139.954,60.198 114.3,60.198 114.3,50.038 ; 114.3,62.222 139.954,62.222 139.954,73.652 114.3,73.652 114.3,62.222
  text "+5VA" at 115.062,71.12 h1.52
  text "+3.3VA" at 82.804,69.596 h1.52
  text "Filter_Out" at 114.808,58.166 h1.52
  text "Filter_In" at 73.906,57.912 h1.52